# EAGLE board Full System 3.0 (EAGLE 8.6.3)
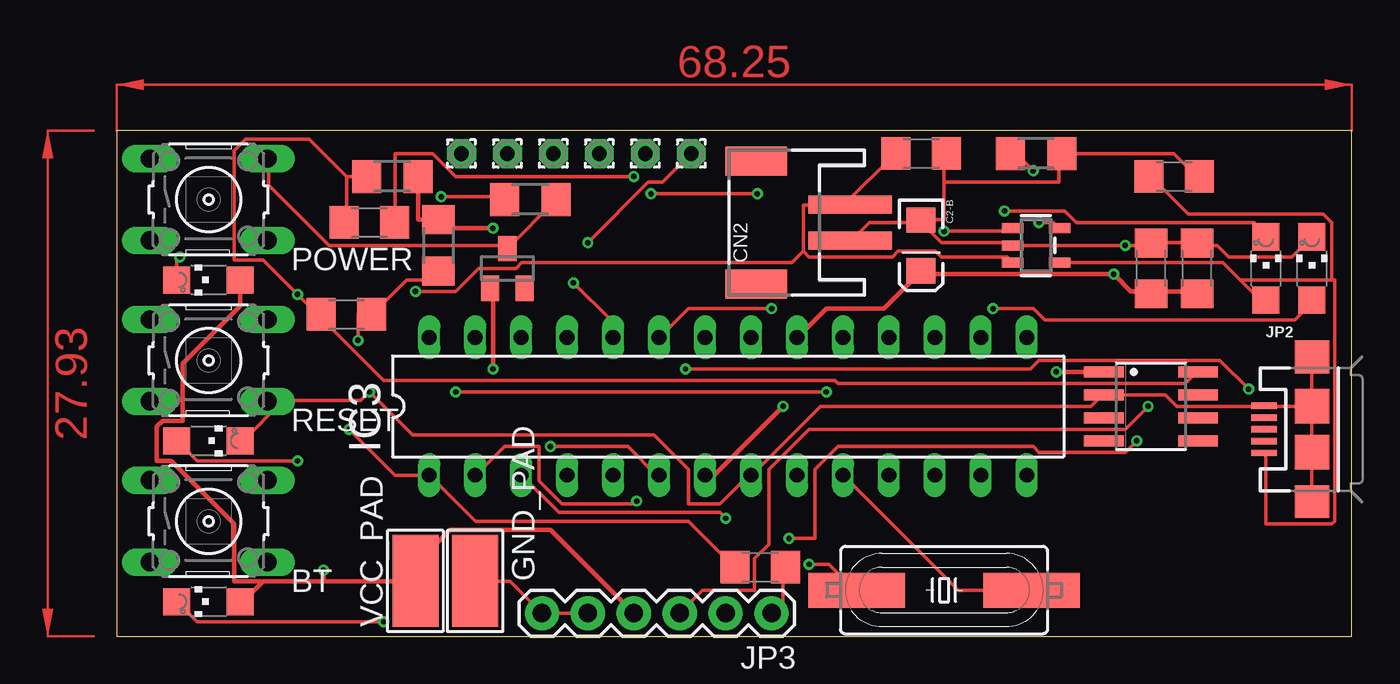
[diagram p0: board, top side]
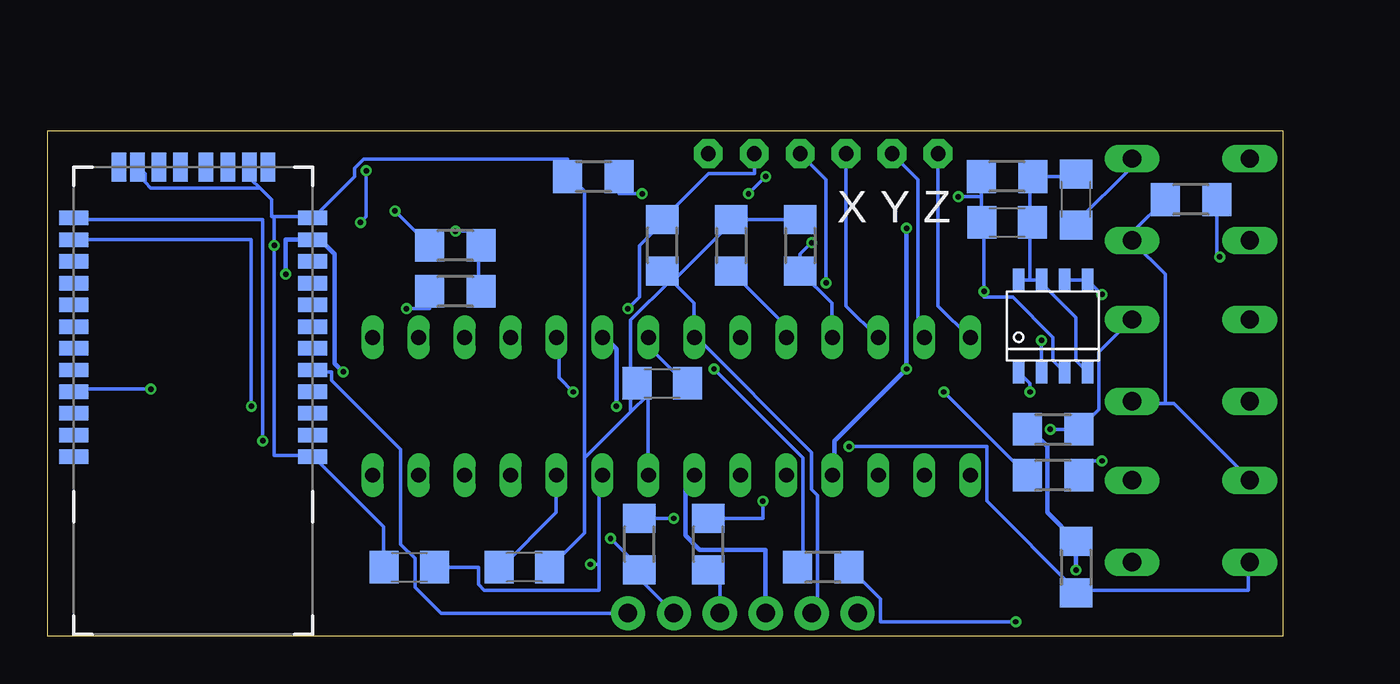
[diagram p1: board, bottom side, seen from below]

Size 68.25 x 27.93 mm. Coordinates in mm from the lower left corner, seen from the top.
Outline: 0,0 68.25,0 68.25,27.93 0,27.93 0,0
Copper layers (1*16): Top 0.035mm / dielectric 1.5mm / Bottom 0.035mm
Design rules "PCBWay_2layer": minimum track width 6mil, minimum drill 0.3mm, track to track 6mil, track to pad 6mil, pad to pad 6mil, via to via 6mil, smd to smd 4mil, copper to edge 10mil, drill to drill 6mil, minimum pad ring 6mil, minimum via ring 6mil, stop-mask expansion 4mil, vias tented up to drill 0.8mm, thermal gap 10mil
Net classes: 0 default: width 0.203 mm; 1 power: width 0.254 mm

## Footprints (pad centres in the part's own frame; a part is rotated, then mirrored left to right if it is on the bottom)
1,6/0,8 = drill 0.813 pad 1.6 octagon: 1 0,0
B3F-10XX = drill 1.016 long: 1 -3.251,2.261; 2 3.251,2.261; 3 -3.251,-2.261; 4 3.251,-2.261
C1206 = smd 1.6 x 1.8: 1 -1.4,0; 2 1.4,0
EIA3216 = smd 1.4 x 1.6: A 1.4,0; C -1.4,0
JSTPH2 = smd 1 x 4.6: 1 -1,-3.7; 2 1,-3.7 | smd 1.6 x 3.4: NC1 -3.4,1.5; NC2 3.4,1.5
SOT23 = smd 1 x 1.4: 1 -0.95,-1.1; 2 0.95,-1.1; 3 0,1.1
CHIPLED_1206 = smd 1.5 x 1.5: A 0,-1.75; C 0,1.75
5-2,5 = smd 2.54 x 5.08: 1 0,0
SO08 = smd 0.6 x 2.2: 1 -1.905,-2.6; 2 -0.635,-2.6; 3 0.635,-2.6; 4 1.905,-2.6; 5 1.905,2.6; 6 0.635,2.6; 7 -0.635,2.6; 8 -1.905,2.6
DIL28-3 = drill 0.813 long: 1 -16.51,-3.81; 2 -13.97,-3.81; 3 -11.43,-3.81; 4 -8.89,-3.81; 5 -6.35,-3.81; 6 -3.81,-3.81; 7 -1.27,-3.81; 8 1.27,-3.81; 9 3.81,-3.81; 10 6.35,-3.81; 11 8.89,-3.81; 12 11.43,-3.81; 13 13.97,-3.81; 14 16.51,-3.81; 15 16.51,3.81; 16 13.97,3.81; 17 11.43,3.81; 18 8.89,3.81; 19 6.35,3.81; 20 3.81,3.81; 21 1.27,3.81; 22 -1.27,3.81; 23 -3.81,3.81; 24 -6.35,3.81; 25 -8.89,3.81; 26 -11.43,3.81; 27 -13.97,3.81; 28 -16.51,3.81
USB-MICROB = smd 1.4 x 0.35: D+ -2.65,0; D- -2.65,-0.65; GND -2.65,1.3; ID -2.65,0.65; VBUS -2.65,-1.3 | smd 1.9 x 1.8: MT1 0,-4; MT2 0,4 | smd 1.9 x 1.9: P$1 0,-1.27; P$2 0,1.27
1X06 = drill 1.016 pad 1.88: 1 0,0; 2 2.54,0; 3 5.08,0; 4 7.62,0; 5 10.16,0; 6 12.7,0
R1206 = smd 1.6 x 1.803: 1 -1.422,0; 2 1.422,0
RN41 = smd 0.8 x 1.6: 1 -6.6,-6.6; 2 -5.4,-6.6; 3 -4.2,-6.6; 4 -3,-6.6; 5 -1.8,-6.6; 6 -0.6,-6.6; 7 0.6,-6.6; 8 1.8,-6.6; 9 3,-6.6; 10 4.2,-6.6; 11 5.4,-6.6; 12 6.6,-6.6; 13 6.6,6.6; 14 5.4,6.6; 15 4.2,6.6; 16 3,6.6; 17 1.8,6.6; 18 0.6,6.6; 19 -0.6,6.6; 20 -1.8,6.6; 21 -3,6.6; 22 -4.2,6.6; 23 -5.4,6.6; 24 -6.6,6.6 | smd 1.6 x 0.8: 28 9.4,3.1; 29 9.4,-3.1; 30 9.4,4.122; 31 9.4,1.9; 32 9.4,0.7; 33 9.4,-0.7; 34 9.4,-1.9; 35 9.4,-4.122
SOT23-5 = smd 0.55 x 1.2: 1 -0.95,-1.3; 2 0,-1.3; 3 0.95,-1.3; 4 0.95,1.3; 5 -0.95,1.3
HC49UP = smd 5.334 x 1.93: 1 -4.826,0; 2 4.826,0
IRF7319PBF = smd 0.635 x 1.27: 1 0.635,-0.635; 2 1.905,-0.635; 3 3.175,-0.635; 4 4.445,-0.635; 5 4.445,4.445; 6 3.175,4.445; 7 1.905,4.445; 8 0.635,4.445

## Placement (x,y rotation side)
ACC_X  [1,6/0,8]  24.13,26.67 0 top
ACC_Y  [1,6/0,8]  21.59,26.67 0 top
ACC_Z  [1,6/0,8]  19.05,26.67 0 top
BT  [B3F-10XX]  5.08,6.35 0 top
C1  0.1uF  [C1206]  34.29,13.97 0 bottom
C1-B  0.1uF  [C1206]  57.15,20.32 90 top
C1-M  18pF  [C1206]  48.26,3.81 0 bottom
C2  0.1uF  [C1206]  35.56,3.81 0 top
C2-B  10uF  [EIA3216]  44.45,21.59 270 top
C2-M  18pF  [C1206]  41.91,3.81 180 bottom
C4-PB  10µF  [C1206]  12.7,17.78 0 top
C6-PB  0.1uF  [C1206]  15.24,22.86 0 bottom
C7-PB  1uF  [C1206]  11.43,24.13 90 bottom
C8-C  10µF  [C1206]  58.42,25.4 0 top
C9-C  10µF  [C1206]  44.45,26.67 0 top
C10-R  0.1uF  [C1206]  13.97,22.86 0 top
C11-R  2.2uF  [C1206]  59.69,20.32 90 top
CN2  JSTPH  [JSTPH2]  36.83,22.86 90 top
D1-PB  [SOT23]  21.59,20.32 0 top
D3  Green  [CHIPLED_1206]  5.08,10.79 270 top
FLX0-  [1,6/0,8]  29.21,26.67 0 top
FLX1-  [1,6/0,8]  26.67,26.67 0 top
FLX2-  [1,6/0,8]  31.75,26.67 0 top
GND_PAD  5x2.5mm  [5-2,5]  19.81,3.05 0 top
IC2  L4931D  [SO08]  57.15,12.7 270 top
IC3  MEGA8-P  [DIL28-3]  33.78,12.7 0 top
JP2  [USB-MICROB]  66.04,11.43 0 top
JP3  FTDI Basic  [1X06]  36.19,1.27 180 top
LED1  Red  [CHIPLED_1206]  5.08,19.68 90 top
LED2-M  Blue  [CHIPLED_1206]  5.08,1.91 90 top
LED3-C  RED  [CHIPLED_1206]  63.5,20.32 0 top
LED4-C  GREEN  [CHIPLED_1206]  66.04,20.32 0 top
POWER  [B3F-10XX]  5.08,24.13 0 top
R1-M1  35k  [R1206]  34.29,21.59 270 bottom
R1-M2  35k  [R1206]  30.48,21.59 90 bottom
R1-M3  35k  [R1206]  26.67,21.59 90 bottom
R2  10K  [R1206]  12.7,11.43 180 bottom
R3-M  1k  [R1206]  31.75,5.08 270 bottom
R4-M  1k  [R1206]  35.56,5.08 270 bottom
R4-PB  100k  [R1206]  15.24,25.4 0 top
R5-M  10k  [R1206]  11.43,3.81 90 bottom
R5-PB  300k  [R1206]  17.78,21.59 90 top
R6  330  [R1206]  12.7,8.89 0 bottom
R6-PB  10k  [R1206]  22.86,24.13 0 top
R7-PB  100k  [R1206]  15.24,25.4 0 bottom
R8-C  470  [R1206]  45.72,21.59 0 bottom
R8-C1  470  [R1206]  25.4,3.81 0 bottom
R9-C  470  [R1206]  45.72,19.05 0 bottom
R10-C  5K\  [R1206]  50.8,26.67 0 top
R11  1k  [R1206]  5.08,24.13 0 bottom
R13-R  33  [R1206]  38.1,25.4 180 bottom
RESET  [B3F-10XX]  5.08,15.24 0 top
U1  BLUETOOTH-RN41"  [RN41]  60.2,16.51 90 bottom
U2  MCP73831T-2ACI/OT  [SOT23-5]  50.8,21.59 270 top
U$2  [HC49UP]  45.72,2.54 180 top
U$8  IRF7319PBF  [IRF7319PBF]  15.24,15.24 0 bottom
VCC_PAD  5x2.5mm  [5-2,5]  16.51,3.05 0 top

## Library data of the parts
ACC_X ACC_Y ACC_Z FLX0- FLX1- FLX2- GND_PAD VCC_PAD = wirepad
BT POWER RESET = switch-omron; MPN: B3F-1000; OC_FARNELL: 176432; OC_NEWARK: 36M3542
C1 C1-B C1-M C2 C2-M C4-PB C6-PB C7-PB C8-C C9-C C10-R C11-R = rcl; SPICEPREFIX: C
C2-B JP3 = SparkFun
CN2 U2 = microbuilder
D1-PB = semicon-smd-ipc
D3 LED1 LED2-M LED3-C LED4-C = led
IC2 = v-reg-3
IC3 = atmel; OC_FARNELL: unknown; OC_NEWARK: unknown
JP2 = SparkFun-Connectors; PROD_ID: CONN-09505; SF_ID: PRT-08533
R1-M1-R1-M3 R2 R3-M R4-M R4-PB R5-M R5-PB R6 R6-PB R7-PB R8-C R8-C1 R9-C R10-C R11 R13-R = rcl; SPICEPREFIX: R
U1 = SparkFun-RF
U$2 = crystal; OC_FARNELL: unknown; OC_NEWARK: unknown
U$8 = IRF7319PbF

## Nets
3.3V [power]: C1-B.1 C2-B.A C11-R.1 IC2.1 IC3.7 IC3.20 JP3.4 LED1.A LED2-M.A R2.2 R5-M.2 U1.11 VCC_PAD.1
ACC_X: ACC_X.1 IC3.26
ACC_Y: ACC_Y.1 IC3.27
ACC_Z: ACC_Z.1 IC3.28
DTR: C2.2 JP3.1 U1.5
FLX0: FLX0-.1 IC3.23 R1-M1.1
FLX1: FLX1-.1 IC3.24 R1-M2.1
FLX2: FLX2-.1 IC3.25 R1-M3.1
GND: BT.1 C1-B.2 C1-M.1 C1.1 C2-B.C C2-M.1 C8-C.2 C9-C.2 C11-R.2 CN2.1 D3.C GND_PAD.1 IC2.2 IC3.8 IC3.22 JP2.GND JP2.MT1 JP2.MT2 JP2.P$1 JP2.P$2 JP3.5 JP3.6 LED4-C.C POWER.4 R1-M1.2 R1-M2.2 R1-M3.2 R10-C.2 R11.1 R13-R.2 RESET.4 U1.1 U1.12 U1.28 U1.29 U2.2 U$8.1
MISO: IC3.18
MOSI: IC3.17
N$2: C1-M.2 IC3.9 U$2.2
N$3: C2-M.2 IC3.10 U$2.1
N$4: C6-PB.2 C7-PB.2 R7-PB.2 U$8.4 U$8.7 U$8.8
N$5: C7-PB.1 D1-PB.3 POWER.2 R6-PB.2
N$6: BT.3 IC3.6 R5-M.1
N$7: LED1.C R11.2
N$8: C10-R.2 R13-R.1
N$9: C4-PB.2 R5-PB.1 U$8.2
N$10: LED2-M.C R8-C1.2
N$11: D3.A R6.2
N$12: R8-C1.1 U1.21
N$15: C1.2 IC3.21
N$16: LED3-C.C R8-C.1
N$17: R8-C.2 R9-C.2 U2.1
N$18: R10-C.1 U2.5
N$19: LED4-C.A R9-C.1
N$31: IC3.2 R3-M.1
N$32: IC3.3 R4-M.1
POWER_OFF [power]: D1-PB.1 IC3.4 R4-PB.2 R5-PB.2
RESET: C2.1 IC3.1 R2.1 RESET.2
RXI: JP3.3 R3-M.2 U1.14
SCK: IC3.19 R6.1
TXO: JP3.2 R4-M.2 U1.13
V_IN: C4-PB.1 C10-R.1 IC2.8 R4-PB.1 U$8.5 U$8.6
VBAT: C6-PB.1 C9-C.1 CN2.2 R6-PB.1 R7-PB.1 U2.3 U$8.3
VBUS: C8-C.1 JP2.VBUS LED3-C.A U2.4

## Tracks (layer width: path | path; a pad name or v marks a point on that pad's centre or on a via)
3.3V  (via drill 0.3)
  Top 0.254: IC3.20 37.62,16.51 39.21,18.1 42.39,18.1 44.45,20.16 C2-B.A 44.45,20 v55.09,20 56.04,19.05 57.15,19.05 | 57.15,19.05 59.69,19.05 C11-R.1 | 57.15,19.05 C1-B.1 | v51.91,14.61 IC2.1 | 8.02,2.94 8.1,3.02 11.43,3.02 | 8.02,2.94 6.98,1.91 LED2-M.A | 15.56,3.02 16.51,3.02 VCC_PAD.1 15.56,3.02 | 15.56,3.02 11.43,3.02 | LED1.A 6.83,18.26 3.65,15.08 3.65,11.91 2.54,11.91 2.22,11.59 2.22,9.68 3.02,9.68 6.51,6.19 6.51,3.02 7.94,3.02 8.02,2.94 | 11.43,3.02 v11.43,3.65 | JP3.4 23.97,5.87 18.41,5.87 15.56,3.02 | v36.83,12.7 33.02,8.89 IC3.7
  Bottom 0.254: v55.09,20 55.09,21.91 53.66,21.91 U1.11 53.5,21.91 53.18,21.91 52.39,21.11 52.39,15.08 v51.91,14.61 | JP3.4 28.58,4.76 32.23,4.76 33.02,5.56 33.02,8.41 32.54,8.89 IC3.7 | R2.2 13.97,11.43 13.02,10.48 13.02,6.83 R5-M.2 v11.43,3.65 | v36.83,12.7 36.83,15.88 37.47,16.51 IC3.20
ACC_X
  Bottom 0.203: ACC_X.1 24.13,18.26 22.38,16.51 IC3.26
ACC_Y
  Bottom 0.203: ACC_Y.1 20.16,25.24 20.16,16.83 19.84,16.51 IC3.27
ACC_Z
  Bottom 0.203: ACC_Z.1 19.05,18.26 17.3,16.51 IC3.28
DTR
  Top 0.203: JP3.1 36.83,1.27 36.83,3.81 C2.2
  Bottom 0.203: JP3.1 46.51,1.27 47.94,2.7 47.94,4.29 48.74,5.08 48.74,10.32 52.55,14.13 52.55,14.61 53.5,14.61 U1.5
FLX0  (via drill 0.3)
  Top 0.203: v36.19,18.1 31.59,18.1 30,16.51 IC3.23
  Bottom 0.203: FLX0-.1 29.21,25.56 31.75,25.56 R1-M1.1 34.29,22.86 35.56,21.59 35.56,18.73 v36.19,18.1
FLX1  (via drill 0.3)
  Top 0.203: v25.24,19.53 27.3,17.46 27.3,16.51 IC3.24
  Bottom 0.203: R1-M2.1 27.46,17.14 27.46,16.51 IC3.24 | FLX1-.1 25.24,25.24 v25.24,19.53
FLX2  (via drill 0.3)
  Top 0.203: FLX2-.1 30.16,25.08 29.37,25.08 v26.03,21.75
  Bottom 0.203: IC3.25 24.92,16.51 24.92,18.41 R1-M3.1 26.67,21.11 v26.03,21.75
GND  (via drill 0.3)
  Top 0.203: C8-C.2 59.69,25.4 58.42,26.67 R10-C.2 52.07,26.67 52.07,25.08 45.72,25.08 | LED4-C.C 64.93,20.95 61.44,20.95 60.8,21.59 59.69,21.59 C11-R.2 59.69,21.75 57.15,21.75 C1-B.2 57.15,21.59 v55.72,21.59 U2.2 49.37,21.59 49.21,21.75 45.56,21.75 44.45,22.86 | 45.72,25.08 45.72,23.02 44.45,23.02 C2-B.C 44.45,22.86 | 45.72,25.08 45.72,26.67 C9-C.2 | 44.45,22.86 41.59,22.86 40.64,21.91 CN2.1 | 9.21,13.02 8.41,13.02 RESET.4 9.21,13.02 | 9.21,13.02 13.49,13.02 v13.97,13.49 16.35,11.11 29.69,11.11 31.59,9.21 31.59,7.3 33.34,7.3 34.92,8.89 IC3.8 35.08,8.89 38.89,12.7 53.82,12.7 54.45,13.34 IC2.2 57.94,13.34 58.58,12.7 63.34,12.7 JP2.GND 63.5,12.7 JP2.P$2 | 9.21,13.02 6.98,10.79 D3.C | JP2.MT1 JP2.P$1 JP2.P$2 | JP2.P$2 JP2.MT2 | JP3.5 JP3.6 21.75,3.02 19.84,3.02 GND_PAD.1
  Bottom 0.203: C1-M.1 49.69,3.81 49.69,6.03 53.5,9.84 U1.1 53.66,10 55.72,10 v55.72,21.59 55.72,23.18 | 55.72,23.18 55.88,23.18 55.88,24.13 56.52,24.77 | 55.72,23.18 53.66,23.18 U1.12 53.5,23.18 51.28,25.4 51.28,25.88 50.8,26.35 39.53,26.35 R13-R.2 39.37,25.4 38.58,24.61 38.58,9.84 | 56.52,24.77 56.99,25.24 56.99,25.88 U1.29 | 56.52,24.77 62.55,24.77 62.86,25.08 62.86,25.56 63.18,25.88 U1.28 | R11.1 8.26,22.38 8.26,21.91 POWER.4 8.26,21.75 6.51,20 6.51,12.86 | U$8.1 13.97,13.97 v13.97,13.49 | 6.51,12.86 8.26,12.86 RESET.4 | 6.51,12.86 6.03,12.86 1.91,8.73 BT.1 | R1-M3.2 R1-M2.2 30.48,22.86 33.66,19.68 33.66,19.53 | 33.66,19.53 32.54,18.41 32.54,16.51 IC3.22 32.39,16.51 26.03,10.16 26.03,8.1 25.72,7.78 25.72,1.59 JP3.5 | 33.66,19.53 33.81,19.68 | 33.81,19.68 R1-M1.2 | 33.66,19.53 R1-M1.2 | 35.08,13.34 35.08,8.89 IC3.8 | 35.08,13.34 35.08,13.49 35.56,13.97 C1.1 35.08,13.34 | 38.58,9.84 38.58,5.71 40.48,3.81 C2-M.1 | 35.08,13.34 36.04,12.38 | 36.04,12.38 38.58,9.84 | 33.81,19.68 36.04,17.46 36.04,12.38 | 33.81,19.68 R1-M1.2
N$2  (via drill 0.3)
  Top 0.203: v38.26,3.97 39.37,3.97 40.8,2.54 U$2.2
  Bottom 0.203: C1-M.2 44.45,3.81 44.45,2.86 44.13,2.54 37.78,2.54 37.78,3.97 | 37.78,3.97 37.78,8.73 37.62,8.89 IC3.9 | 37.78,3.97 v38.26,3.97
N$3
  Top 0.203: U$2.1 46.51,2.54 40.16,8.89 IC3.10
  Bottom 0.203: C2-M.2 43.18,3.81 40.16,6.83 40.16,8.89 IC3.10
N$4
  Bottom 0.203: C7-PB.2 11.43,25.4 R7-PB.2 13.97,25.4 13.97,22.86 | U$8.4 11.43,15.24 11.43,17.62 13.34,19.53 U$8.7 13.97,19.68 | 13.97,19.68 U$8.8 | 13.97,19.68 13.97,22.86 | 13.97,22.86 C6-PB.2
N$5
  Top 0.203: 21.59,21.43 R6-PB.2 | 21.59,21.43 21.43,21.59 11.75,21.59 8.41,24.92 8.41,26.35 POWER.2 | 21.59,21.43 D1-PB.3
  Bottom 0.203: C7-PB.1 11.43,22.86 8.41,25.88 8.41,26.35 POWER.2
N$6  (via drill 0.3)
  Top 0.203: v23.97,10.48 28.26,10.48 29.84,8.89 IC3.6
  Bottom 0.203: 11.43,2.54 1.91,2.54 1.91,3.97 BT.3 | v23.97,10.48 16.35,10.48 16.35,7.46 11.43,2.54 | 11.43,2.54 R5-M.1
N$7  (via drill 0.3)
  Top 0.203: v3.49,20.95 3.33,20.95 LED1.C
  Bottom 0.203: v3.49,20.95 3.65,21.11 R11.2
N$8  (via drill 0.3)
  Top 0.203: v28.58,25.4 18.73,25.4 17.46,26.67 15.4,26.67 15.4,22.86 C10-R.2 | v35.4,24.45 v29.53,24.45
  Bottom 0.203: v29.53,24.45 v28.58,25.4 | v35.4,24.45 36.67,24.45 R13-R.1
N$9  (via drill 0.3)
  Top 0.203: v13.34,16.35 13.34,17.78 C4-PB.2 14.13,17.78 16.03,19.68 17.3,19.68 R5-PB.1
  Bottom 0.203: v13.34,16.35 U$8.2
N$10  (via drill 0.3)
  Top 0.203: v14.76,0.79 4.45,0.79 LED2-M.C
  Bottom 0.203: v14.76,0.79 22.23,0.79 22.23,2.06 R8-C1.2
N$11  (via drill 0.3)
  Top 0.203: v10,9.68 4.45,9.68 D3.A
  Bottom 0.203: v10,9.68 11.27,9.68 R6.2
N$12  (via drill 0.3)
  Top 0.203: v62.55,13.65 60.96,15.24 50.96,15.24 50.48,14.76 v31.43,14.76
  Bottom 0.203: v62.55,13.65 66.67,13.65 U1.21 | v31.43,14.76 26.51,9.84 26.51,3.97 26.67,3.81 R8-C1.1
N$15
  Bottom 0.203: C1.2 33.02,13.97 34.92,15.88 34.92,16.51 IC3.21
N$16  (via drill 0.3)
  Top 0.203: v49.05,23.5 52.39,23.5 53.02,22.86 62.86,22.86 63.5,22.23 LED3-C.C
  Bottom 0.203: v49.05,23.5 R8-C.1
N$17  (via drill 0.3)
  Top 0.203: v45.72,22.38 49.37,22.38 U2.1
  Bottom 0.203: v45.72,22.38 44.45,22.38 44.45,21.59 | 44.45,21.59 44.45,19.05 R9-C.2 | 44.45,21.59 R8-C.2
N$18  (via drill 0.3)
  Top 0.203: v50.96,22.86 51.75,22.86 52.07,22.54 U2.5 | v50.64,25.72 49.69,26.67 R10-C.1
  Bottom 0.203: v50.96,22.86 50.64,23.18 v50.64,25.72
N$19  (via drill 0.3)
  Top 0.203: v48.42,18.1 50.64,18.1 51.28,17.46 65.09,17.46 66.04,18.41 LED4-C.A
  Bottom 0.203: v48.42,18.1 47.15,18.1 R9-C.1
N$31  (via drill 0.3)
  Top 0.203: v28.73,7.46 28.58,7.3 24.61,7.3 23.34,8.57 23.34,10.48 21.43,10.48 19.84,8.89 IC3.2
  Bottom 0.203: v28.73,7.46 28.73,6.51 R3-M.1
N$32  (via drill 0.3)
  Top 0.203: v33.66,6.51 33.34,6.83 24.45,6.83 22.38,8.89 IC3.3
  Bottom 0.203: v33.66,6.51 R4-M.1
POWER_OFF  (via drill 0.3)
  Top 0.254: R4-PB.2 16.67,23.02 R5-PB.2 17.78,22.86 18.1,22.54 v20.8,22.54 | v20.8,14.76 20.8,19.21 D1-PB.1
  Bottom 0.254: IC3.4 24.77,8.89 24.77,10.79 v20.8,14.76 v20.8,22.54
RESET  (via drill 0.3)
  Top 0.203: C2.1 34.13,3.81 31.59,6.35 19.84,6.35 17.3,8.89 IC3.1 15.4,8.89 v12.86,11.43
  Bottom 0.203: RESET.2 8.41,17.46 10.16,15.72 10.16,12.54 R2.1 v12.86,11.43
RXI  (via drill 0.3)
  Top 0.203: v56.99,12.7 55.72,11.43 38.26,11.43 36.04,9.21 36.04,5.08 35.24,4.29 35.24,2.54 32.39,2.54 JP3.3
  Bottom 0.203: v56.99,12.7 56.99,21.91 66.67,21.91 U1.14 | JP3.3 31.12,3.02 R3-M.2
SCK  (via drill 0.3)
  Top 0.203: v39.21,13.49 v18.73,13.49
  Bottom 0.203: v18.73,13.49 R6.1 | v39.21,13.49 40,14.29 40,16.51 IC3.19
TXO  (via drill 0.3)
  Top 0.203: v56.36,10.79 55.72,10.16 50.96,10.16 50.64,10.48 39.85,10.48 38.58,9.21 38.58,5.4 v37.15,5.4
  Bottom 0.203: v56.36,10.79 56.36,23.02 66.67,23.02 U1.13 | v37.15,5.4 35.56,3.81 R4-M.2 35.56,3.17 JP3.2
V_IN  (via drill 0.3)
  Top 0.203: 12.7,25.4 12.7,22.86 C10-R.1 | R4-PB.1 12.7,25.4 | 11.11,17.78 v10,18.89 8.1,20.8 6.51,20.8 6.51,26.83 7.14,27.46 10.64,27.46 12.7,25.4 | 11.11,17.78 C4-PB.1 11.27,17.78 | 11.11,17.78 14.76,14.13 39.69,14.13 39.85,13.97 59.06,13.97 59.69,14.61 IC2.8
  Bottom 0.203: U$8.6 U$8.5 v10,18.89
VBAT  (via drill 0.3)
  Top 0.203: 37.94,21.27 38.26,20.95 42.86,20.95 43.18,21.27 45.24,21.27 45.56,20.95 49.21,20.95 49.37,20.8 U2.3 | 37.94,21.27 37.94,23.81 40.16,23.81 | 40.16,23.81 40.48,23.81 CN2.2 40.16,23.81 | 40.16,23.81 43.02,26.67 C9-C.1 | v17.94,24.29 21.27,24.29 R6-PB.1 | 37.94,21.27 37.31,20.64 22.38,20.64 22.07,20.32 20,20.32 18.73,19.05 v16.51,19.05
  Bottom 0.203: U$8.3 12.7,15.24 12.7,16.51 14.92,18.73 16.51,18.73 v16.51,19.05 16.51,22.86 C6-PB.1 16.67,22.86 16.67,24.29 | 16.67,24.29 R7-PB.1 | 16.67,24.29 v17.94,24.29
VBUS
  Top 0.203: 62.07,19.68 63.18,18.57 LED3-C.A | 62.07,19.68 61.12,20.64 52.23,20.64 U2.4 | 62.07,19.68 67.15,19.68 | 67.15,19.68 67.31,19.68 67.31,6.35 67.15,6.19 63.5,6.19 63.5,10 JP2.VBUS | 67.15,19.68 67.15,22.86 66.67,23.34 59.21,23.34 57.15,25.4 C8-C.1
(copper drawn outside any net)
  shapes: Top area x2

## Text on the board
bPlace: X Y Z